# Altium PCB PCB1 - 副本.PcbDoc
Units mil, origin at the board's own origin, x right, y up, seen from the top; angles counter-clockwise.
Board outline 2165.35 x 6102.36 mil, 2 copper layers (Top Layer, Bottom Layer); 142 components, 117 nets, 421 pads, 58 vias.
Unrouted connection lines stored in the file: 77.
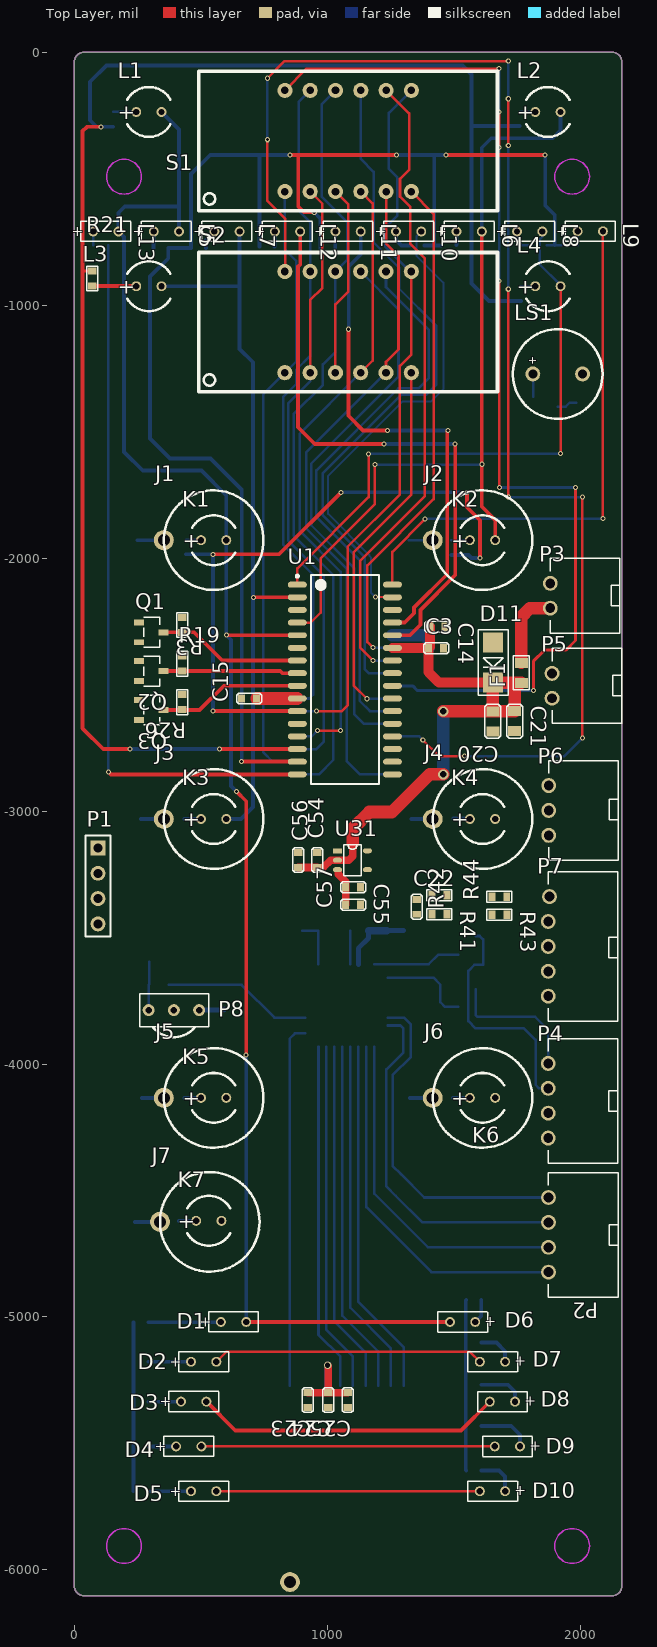
[diagram p0: Top Layer view]
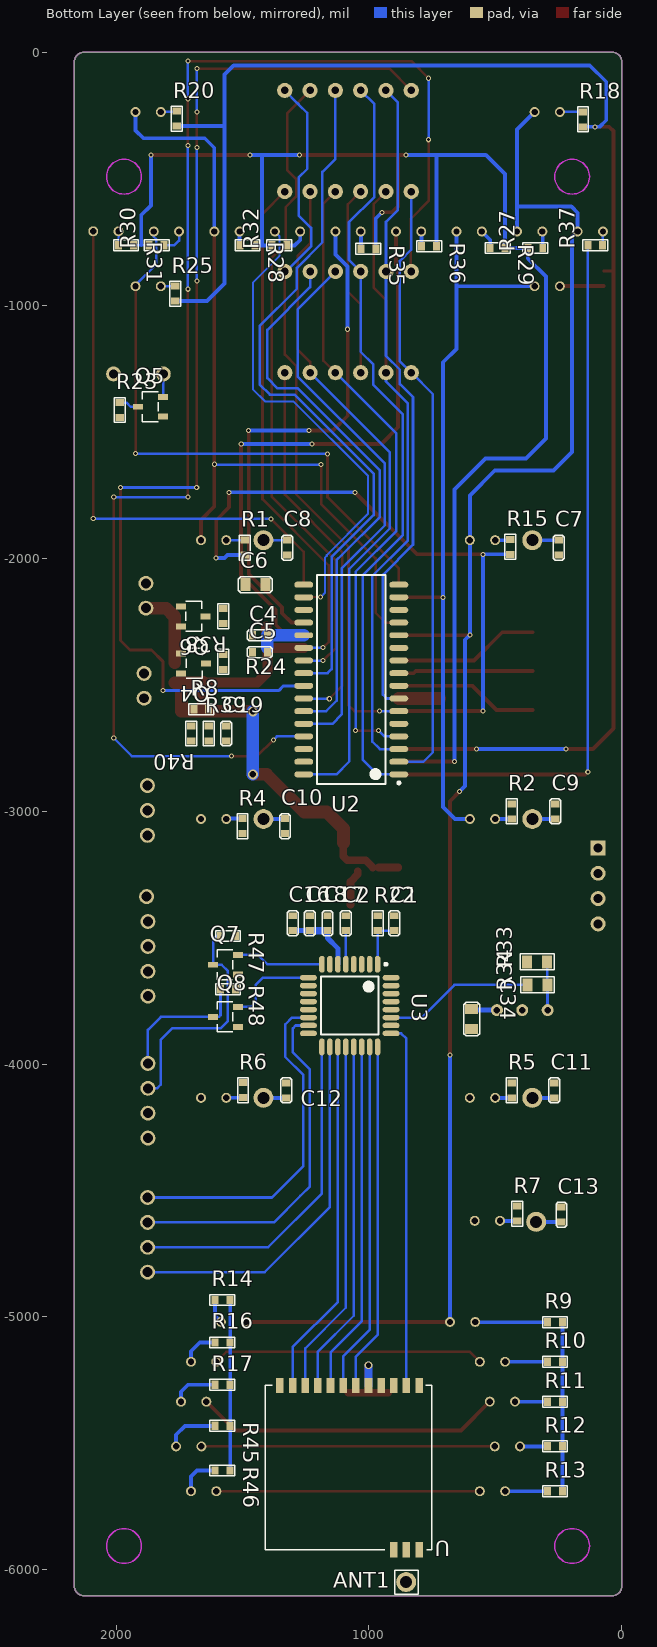
[diagram p1: Bottom Layer view, seen from below]

## Layer stack, top to bottom
Top Layer: signal copper 1.4
Dielectric: dielectric 12.6, FR-4, Dk 4.8
Bottom Layer: signal copper 1.4

## Board outline
0,-6062.99 ccw(c39.37,-6062.99) 39.37,-6102.36 2125.98,-6102.36 ccw(c2125.98,-6062.99) 2165.35,-6062.99 2165.35,-6062.65 2165.35,-39.37 ccw(c2125.98,-39.37) 2125.98,0 39.37,0 ccw(c39.37,-39.37) 0,-39.37

## Design rules (kind name [scope] priority, off if disabled: settings)
Clearance [All] p1: gap=10
PolygonConnect [All] p1: connectstyle=Relief reliefconductorwidth=10 reliefentries=4 polygonreliefangle="90 Angle"
RoutingVias [All] p1: holewidth=28 width=50 viastyle="Through Hole" minholewidth=28 minwidth=50 maxholewidth=28 maxwidth=50
SilkscreenOverComponentPads [All] p1: minsilkscreentomaskgap=10
SolderMaskExpansion [All] p1: expansion=4
Width [All] p1: maxlimit=200 minlimit=6 preferedwidth=10 minimp=50.000000 maximp=50.000000 favimp=50.000000
27 further rules are at their usual default settings.

## Classes and differential pairs
component class TouchPad: C4 C5 C6 C7 C8 C9 C10 C11 C12 C13 J1 J2 J3 J4 J5 J6 J7 LS1 Q1 Q4 Q6 R23 R24 R38 S1 S2 U2
component class INTERFACE: C19 C20 C21 C22 D11 F1 P2 P3 P4 P5 P6 P7 Q7 Q8 R8 R39 R40 R41 R42 R43 R44 R47 R48
component class LED: C3 C14 C15 D1 D2 D3 D4 D5 D6 D7 D8 D9 D10 K1 K2 K3 K4 K5 K6 K7 L1 L2 L3 L4 L5 L6 L7 L8 L9 L10 L11 L12 L13 Q1 Q2 Q3 R1 R2 R3 R4 R5 R6 R7 R9 R10 R11 R12 R13 R14 R15 R16 R17 R18 R19 R20 R21 R25 R26 R27 R28 R29 R30 R31 R32 R35 R36 R37 R45 R46 U1
component class MCU: C1 C2 C16 C17 C18 P1 R22 U3
component class RF: ANT1 C23 C24 C25 C34 C54 C55 C56 C57 P8 R33 R34 U U31

## Components (designator, comment, footprint, x,y, rotation, side; value= is the part's Value field where it differs from the comment)
ANT1 "TP" ANT_TH 853,-6048 r270 bottom
C1 "0.1uF/16V" 0603C 901,-3473 r90 bottom
C2 "2.2uF/6.3V" 0603C 1092,-3413.94 r270 bottom
C3 "0.1uF/16V" 0603C 1401,-2356 r0 top
C4 "0.1uF/16V" 0603C 1402.13,-2305 r0 bottom
C5 "0.01uF/16V" 0603C 1402.13,-2373 r0 bottom
C6 "22uF/16V" 0805C 1410,-2105 r0 bottom
C7 "10PF/16V" 0603C 250,-1988 r90 bottom
C8 "10PF/16V" 0603C 1323,-1988 r90 bottom
C9 "10PF/16V" 0603C 264,-2972 r270 bottom
C10 "10PF/16V" 0603C 1332,-3089.06 r90 bottom
C11 "10PF/16V" 0603C 267,-4075 r270 bottom
C12 "10PF/16V" 0603C 1327,-4075 r270 bottom
C13 "10PF/16V" 0603C 239,-4566 r270 bottom
C14 "0.1uF/16V" 0603C 1406,-2271 r0 top
C15 "10uF/16V" 0603C 721,-2555 r180 top
C16 "0.1uF/16V" 0603C 1302,-3473 r90 bottom
C17 "0.1uF/16V" 0603C 1164,-3473 r90 bottom
C18 "10uF/16V" 0603C 1235,-3473 r90 bottom
C19 "0.1uF/16V" 0603C 1565,-2723.06 r90 bottom
C20 "22uF/16V" 0805C 1655,-2606 r270 top
C21 "10uF/16V" 0805C 1741,-2605 r270 top
C22 "0.1uF/16V" 0603C 1354,-3408 r90 top
C23 "0.1uF/16V" 0603C 924,-5299 r270 top
C24 "0.10uF/16V" 0603C 1004,-5299 r270 top
C25 "10uF/16V" 0603C 1081,-5299 r270 top
C34 "22uF/16V" 0805C 594,-3783 r270 bottom
C54 "0.1uF/10V" 0603C 961,-3223 r90 top
C55 "0.1uF/10V" 0603C 1073,-3302 r0 top
C56 "10uF/10V" 0603C 885,-3164 r270 top
C57 "10uF/10V" 0603C 1132,-3370 r180 top
D1 "LED0" LED_DIP_257MM 579.92,-5019.68 r0 top locked
D2 "LED0" LED_DIP_257MM 461.81,-5177.17 r0 top locked
D3 "LED0" LED_DIP_257MM 422.44,-5334.65 r0 top locked
D4 "LED0" LED_DIP_257MM 402.76,-5511.81 r0 top locked
D5 "LED0" LED_DIP_257MM 461.81,-5688.98 r0 top locked
D6 "LED0" LED_DIP_257MM 1585.43,-5019.68 r180 top locked
D7 "LED0" LED_DIP_257MM 1703.54,-5177.17 r180 top locked
D8 "LED0" LED_DIP_257MM 1742.91,-5335 r180 top locked
D9 "LED0" LED_DIP_257mm 1762.6,-5511.81 r180 top locked
D10 "LED0" LED_DIP_257mm 1703.54,-5688.98 r180 top locked
D11 "SMA6.5CA" SMA 1656,-2334 r270 top
F1 "500mA" 0805R 1768,-2493 r90 top
J1 "TP" TOUCHU_PAD 551.18,-1929.13 r0 top locked
J2 "TP" TOUCHU_PAD 1614.17,-1929.13 r0 top locked
J3 "TP" TOUCHU_PAD 551.18,-3031.5 r0 top locked
J4 "TP" TOUCHU_PAD 1614.17,-3031.5 r0 top locked
J5 "TP" TOUCHU_PAD 551.18,-4133.86 r0 top locked
J6 "TP" TOUCHU_PAD 1614.17,-4133.86 r0 top locked
J7 "TP" TOUCHU_PAD 536,-4624 r0 top locked
K1 "LED0" LED_DIP_5MM 501.18,-1929.13 r0 top locked
K2 "LED0" LED_DIP_5MM 1564.17,-1929.13 r0 top locked
K3 "LED0" LED_DIP_5MM 501.18,-3031.5 r0 top locked
K4 "LED0" LED_DIP_5MM 1564.17,-3031.5 r0 top locked
K5 "LED0" LED_DIP_5MM 501.18,-4133.86 r0 top locked
K6 "LED0" LED_DIP_5MM 1564.17,-4133.86 r0 top locked
K7 "LED0" LED_DIP_5MM 482,-4620 r0 top
L1 "LED0" LED_DIP_5mm 245.28,-236.22 r0 top locked
L2 "LED0" LED_DIP_5mm 1822.83,-236.22 r0 top locked
L3 "LED0" LED_DIP_5mm 245.28,-925.2 r0 top locked
L4 "LED0" LED_DIP_5mm 1822.83,-925.2 r0 top locked
L5 "LED0" LED_DIP_257MM 314.57,-708.66 r0 top locked
L6 "LED0" LED_DIP_257MM 1511.42,-708.66 r0 top locked
L7 "LED0" LED_DIP_257MM 553.94,-708.66 r0 top
L8 "LED0" LED_DIP_257MM 1750.79,-708.66 r0 top locked
L9 "LED0" LED_DIP_257MM 1990.16,-708.03 r0 top locked
L10 "LED0" LED_DIP_257MM 1272.05,-708.66 r0 top
L11 "LED0" LED_DIP_257MM 1032.68,-708.66 r0 top
L12 "LED0" LED_DIP_257MM 793.31,-708.66 r0 top
L13 "LED0" LED_DIP_257MM 75.2,-708.66 r0 top locked
LS1 "Buzzer" BUFFER_0905 1813,-1272 r0 top
P1 "Header 4" HDR1X4 94,-3146 r270 top
P2 "Header 4" 4-2.5MM-W 1875,-4823 r90 top
P3 "Header 2" 2-2.5MM-W 1882,-2198 r90 top
P4 "Header 4" 4-2.5MM-W 1874,-4293 r90 top
P5 "Header 2" 2-2.5MM-W 1889,-2554 r90 top
P6 "Header 3" 3-2.5MM-W 1876,-3096 r90 top
P7 "Header 5" 5-2.5MM-W 1874,-3732 r90 top
P8 "VS1838B" VS1838B 294,-3787 r0 top
Q1 "SI2306." SOT23-3 255.31,-2253.91 r180 top
Q2 "HY0320" SOT23-3 255.31,-2407.46 r180 top
Q3 "HY0320" SOT23-3 255.31,-2561 r180 top
Q4 "SI2306." SOT23-3 1742.43,-2377 r0 bottom
Q5 "S8050" SOT23-3 1814,-1441 r180 bottom
Q6 "SI2306." SOT23-3 1744,-2191 r0 bottom
Q7 "SI2306." SOT23-3 1518,-3647 r180 bottom
Q8 "SI2306." SOT23-3 1518,-3853 r180 bottom
R1 "1.5K" 0603R 1491,-1928.94 r270 bottom
R2 "1.5K" 0603R 436,-3031.06 r90 bottom
R3 "10K" 0603R 428,-2235 r270 top
R4 "1.5K" 0603R 1500,-3030 r270 bottom
R5 "1.5K" 0603R 435,-4134 r90 bottom
R6 "1.5K" 0603R 1498,-4133.06 r90 bottom
R7 "1.5K" 0603R 414,-4621 r90 bottom
R8 "100K" 0603R 1692.65,-2598 r180 bottom
R9 "1.5K" 0603R 294,-5021 r180 bottom
R10 "1.5K" 0603R 294,-5177 r180 bottom
R11 "1.5K" 0603R 294,-5335 r180 bottom
R12 "1.5K" 0603R 294,-5512 r180 bottom
R13 "1.5K" 0603R 294,-5689 r180 bottom
R14 "1.5K" 0603R 1609,-4933 r180 bottom
R15 "1.5K" 0603R 441,-1926 r270 bottom
R16 "1.5K" 0603R 1609,-5101 r180 bottom
R17 "1.5K" 0603R 1609,-5268 r180 bottom
R18 "1.5K" 0603R 154,-236 r270 bottom
R19 "10K" 0603R 428,-2387.5 r270 top
R20 "1.5K" 0603R 1760,-233 r270 bottom
R21 "1.5K" 0603R 72,-924 r90 top
R22 "10K" 0603R 965.65,-3473 r90 bottom
R23 "1K" 0603R 1985,-1444 r90 bottom
R24 "4.7K" 0603R 1576,-2440 r90 bottom
R25 "1.5K" 0603R 1766,-925 r270 bottom
R26 "10K" 0603R 428,-2540 r270 top
R27 "1.5K" 0603R 313,-774 r0 bottom
R28 "1.5K" 0603R 1510,-763 r180 bottom
R29 "1.5K" 0603R 521,-774 r180 bottom
R30 "1.5K" 0603R 1810,-763 r0 bottom
R31 "1.5K" 0603R 1990,-763 r180 bottom
R32 "1.5K" 0603R 1325,-764 r0 bottom
R33 "10K" 0805R 296,-3596 r0 bottom
R34 "100" 0805R 294.26,-3687 r0 bottom
R35 "1.5K" 0603R 1032,-777 r180 bottom
R36 "1.5K" 0603R 792,-768 r180 bottom
R37 "1.5K" 0603R 76,-763 r0 bottom
R38 "4.7K" 0603R 1576,-2200 r270 bottom
R39 "100" 0603R 1633.65,-2723.06 r90 bottom
R40 "100K" 0603R 1702.65,-2664 r270 bottom
R41 "100" 0603R 1414,-3408.35 r0 top
R42 "100K" 0603R 1473,-3333 r180 top
R43 "100" 0603R 1651,-3410 r0 top
R44 "100K" 0603R 1710,-3338 r180 top
R45 "1.5K" 0603R 1609,-5431 r180 bottom
R46 "1.5K" 0603R 1609,-5607 r180 bottom
R47 "4.7K" 0603R 1587,-3494 r180 bottom
R48 "4.7K" 0603R 1587,-3704 r180 bottom
S1 "SEG_4_0.36" DISPLAY_0.36INCH_4 833,-151 r0 top locked
S2 "SEG_4_0.36" DISPLAY_0.36INCH_4 832.68,-867 r0 top locked
U "HW3000" HW3000 802,-5271 r270 bottom
U1 "TM1629A" SOP127P1040X265-32N 1070,-2480 r0 top
U2 "TM1648A" SOP127P1040X265-32N 1070,-2480 r0 bottom
U3 "STM8S003K3T6C" QFP80P900X900X245-32N 1076,-3769 r270 bottom
U31 "TLV70433DBVT" SOT23-5(DBV) 1041,-3157 r0 top

## Footprints (in the part's own frame and the unit in brackets; to place one, negate y for a bottom-side part, rotate by r counter-clockwise, add the part's x,y. Pads: shape width x height; smd on the part's side, far side on the other; paste and mask are expansions set on the pad)
2-2.5MM-W [mm]
  round 1.5 hole 1: 1(0,0) 2(2.5,0)
  silkscreen extent -2.5,-7 5,0
3-2.5MM-W [mm]
  round 1.5 hole 1: 1(0,0) 2(2.5,0) 3(5,0)
  silkscreen extent -2.5,-7 7.5,0
4-2.5MM-W [mm]
  round 1.5 hole 1: 1(0,0) 2(2.5,0) 3(5,0) 4(7.5,0)
  silkscreen extent -2.5,-7 10,0
5-2.5MM-W [mm]
  round 1.5 hole 1: 1(0,0) 2(2.5,0) 3(5,0) 4(7.5,0) 5(10,-0.127)
  silkscreen extent -2.5,-7 12.5,0
0603C [mm]
  rect 0.7x0.85 smd: 1(0,0) 2(1.5,0)
  silkscreen extent -0.5,-0.55 2,0.55
0603R [mm]
  rect 0.7x0.85 smd: 1(0,0) 2(1.5,0)
  silkscreen extent -0.5,-0.55 2,0.55
0805C [mm]
  rect 1x1.3 smd: 1(0,0) 2(2,0)
  silkscreen extent -0.7,-0.8 2.7,0.8
0805R [mm]
  rect 1x1.3 smd: 1(0,0) 2(2,0)
  silkscreen extent -0.7,-0.8 2.7,0.8
ANT_TH [mm]
  round 2 hole 1.2: 1(0,0)
  silkscreen extent -1.19,-1.17 1.24,1.19
BUFFER_0905 [mm]
  round 1.5 hole 0.9: 1(0,0) 2(5,0)
  silkscreen extent -2,-4.5 7,4.5
DISPLAY_0.36INCH_4 [mil]
  round 60 hole 30: 1(0,-400) 2(100,-400) 3(200,-400) 4(300,-400) 5(400,-400) 6(500,-400) 7(500,0) 8(400,0) 9(300,0) 10(200,0) 11(100,0) 12(0,0)
  silkscreen extent -341,-476 841,76
HDR1X4 [mm] "Connector; Header; 4 Position"
  rect 1.5x1.5 hole 0.9: 1(0,0)
  round 1.5 hole 0.9: 2(2.54,0) 3(5.08,0) 4(7.62,0)
  silkscreen extent -1.27,-1.27 8.89,1.27
HW3000 [mil]
  rect 60x30 smd: 1(0,0) 2(0,-50) 3(0,-100) 4(0,-150) 5(0,-200) 6(0,-250) 7(0,-300) 8(0,-350) 9(0,-400) 10(0,-450) 11(0,-500) 12(0,-550) 13(649.61,-100) 14(649.61,-50) 15(649.61,0)
  silkscreen extent 0,-607 650,50
LED_DIP_5MM [mm]
  round 1 hole 0.635: 1(0,0) 2(2.54,0)
  silkscreen extent -0.9,-2.5 3.44,2.5
LED_DIP_5mm [mm]
  round 1 hole 0.635: 1(0,0) 2(2.54,0)
  silkscreen extent -0.9,-2.5 3.44,2.5
LED_DIP_257MM [mm]
  round 1 hole 0.635: 1(0,0) 2(2.54,0)
  silkscreen extent -1.24,-1 3.77,1.02
LED_DIP_257mm [mm]
  round 1 hole 0.635: 1(0,0) 2(2.54,0)
  silkscreen extent -1.24,-1 3.77,1.02
QFP80P900X900X245-32N [mm] "QFP, 32-Leads, Body 9.2x9.2mm (max), Pitch 0.80mm, IPC Medium Density"
  oval 1.7x0.55 smd: 1(-4.15,2.8) 2(-4.15,2) 3(-4.15,1.2) 4(-4.15,0.4) 5(-4.15,-0.4) 6(-4.15,-1.2) 7(-4.15,-2) 8(-4.15,-2.8) 17(4.15,-2.8) 18(4.15,-2) 19(4.15,-1.2) 20(4.15,-0.4) 21(4.15,0.4) 22(4.15,1.2) 23(4.15,2) 24(4.15,2.8)
  oval 0.55x1.7 smd: 9(-2.8,-4.15) 10(-2,-4.15) 11(-1.2,-4.15) 12(-0.4,-4.15) 13(0.4,-4.15) 14(1.2,-4.15) 15(2,-4.15) 16(2.8,-4.15) 25(2.8,4.15) 26(2,4.15) 27(1.2,4.15) 28(0.4,4.15) 29(-0.4,4.15) 30(-1.2,4.15) 31(-2,4.15) 32(-2.8,4.15)
  silkscreen extent -4.27,-2.9 2.9,3.75, body extent -3.5,-3.5 3.5,3.5, height 2.45
SMA [mm]
  rect 2x2 smd: 1(0,0) 2(4,0)
  silkscreen extent -1.3,-1.5 5.3,1.5
SOP127P1040X265-32N [mm] "SOP, 32-Leads, Body 21.0x7.6mm (max), Pitch 1.27mm, IPC Medium Density"
  oval 1.9x0.6 smd: 1(-4.775,9.525) 2(-4.775,8.255) 3(-4.775,6.985) 4(-4.775,5.715) 5(-4.775,4.445) 6(-4.775,3.175) 7(-4.775,1.905) 8(-4.775,0.635) 9(-4.775,-0.635) 10(-4.775,-1.905) 11(-4.775,-3.175) 12(-4.775,-4.445) 13(-4.775,-5.715) 14(-4.775,-6.985) 15(-4.775,-8.255) 16(-4.775,-9.525) 17(4.775,-9.525) 18(4.775,-8.255) 19(4.775,-6.985) 20(4.775,-5.715) 21(4.775,-4.445) 22(4.775,-3.175) 23(4.775,-1.905) 24(4.775,-0.635) 25(4.775,0.635) 26(4.775,1.905) 27(4.775,3.175) 28(4.775,4.445) 29(4.775,5.715) 30(4.775,6.985) 31(4.775,8.255) 32(4.775,9.525)
  silkscreen extent -4.9,-10.5 3.42,10.5, body extent -3.81,-10.49 3.81,10.49, height 2.65
SOT23-3 [mm]
  rect 1x0.6 smd: 1(0,0) 2(0,2) 3(-2.5,1)
  silkscreen extent -2.1,-0.5 -0.5,2.5
SOT23-5(DBV) [mm]
  rect 0.9x0.5 smd: 1(0,0)
  oval 0.9x0.5 smd: 2(0,-0.95) 3(0,-1.9) 4(3,-1.9) 5(3,0)
  silkscreen extent 0.6,-2.5 2.4,0.6
TOUCHU_PAD [mm]
  round 2 hole 1.2: 1(-5,0)
  silkscreen extent -5,-5 5,5
VS1838B [mm]
  round 1.2 hole 0.65: 1(0,0) 2(2.54,0) 3(5.08,0)
  silkscreen extent -0.89,-2.71 6.02,1.65

## Part data
C1 C2 C3 C4 C5 C6 C7 C8 C9 C10 C11 C12 C13 C14 C15 C16 C17 C18 C19 C20 C21 C22 C23 C24 C25 C54 C55 C56 C57: library part Cap, "Capacitor"
C34: library part Cap2, "Capacitor"
D1 D2 D3 D4 D5 D6 D7 D8 D9 D10 K1 K2 K3 K4 K5 K6 K7 L1 L2 L3 L4 L5 L6 L7 L8 L9 L10 L11 L12 L13: "Typical INFRARED GaAs LED"
D11: library part "D Schottky", "Schottky Diode"
F1: library part "Fuse 1", "Fuse"
J1 J2 J3 J4 J5 J6 J7: library part TOUCH_PAD, "TEST_3P"
LS1: "Magnetic Transducer Buzzer"
P1 P2 P4: "Header, 4-Pin"
P3 P5: "Header, 2-Pin"
P6: "Header, 3-Pin"
P7: "Header, 5-Pin"
P8: library part "Header 3", "Header, 3-Pin"
Q1 Q2 Q3 Q4 Q6 Q7 Q8: library part BUK92150-55A, "BUK92150-55A"
Q5: library part NPN, "NPN Bipolar Transistor"
R1 R2 R4 R5 R6 R7 R8 R9 R10 R11 R12 R13 R14 R15 R16 R17 R18 R20 R21 R22 R23 R24 R25 R27 R28 R29 R30 R31 R32 R35 R36 R37 R38 R39 R40 R41 R42 R43 R44 R45 R46 R47 R48: library part Res1, "Resistor"
R3 R19 R26: library part Res2, "Resistor"
R33 R34: library part R, "R"
U31: library part TPS76318

## Via types
v1: diameter 20, hole 12, Top Layer to Bottom Layer, tented both sides, 55 vias
v2: diameter 40, hole 25, Top Layer to Bottom Layer, tented both sides, 2 vias
v3: diameter 30, hole 20, Top Layer to Bottom Layer, tented both sides, 1 vias

## Nets (pads, with @x,y where several pads share a name; then routed paths per layer and width w, separated by ;. In a path a pad name is that pad's centre, name@x,y a point inside that pad or via, vN(x,y) a via of type N, cw(c..) or ccw(c..) an arc to the next point about the centre after c; other vN are vias at no path point)
AD: C19.1 R39.1 U3.16
BUZZER: Q5.1 U3.13
CLK: Q2.2 U3.29
DIG1: S1.6 U2.22 | length 2033.1
  Top Layer w10: v1(1181,-2354) 1159,-2332 1159,-2029 1421,-1767 1421,-639 S1.6
  Bottom Layer w10: v1@1182,-2355 U2.22
DIG2: S1.8 U2.23 | length 2549.7
  Top Layer w10: v1(1181,-2405) 1131,-2355 1131,-2010 1385,-1756 1385,-814 1329,-758 1329,-612 1288,-571 1288,-501 1324,-465 1324,-242 S1.8
  Bottom Layer w10: v1(1181,-2405) U2.23
DIG3: S1.9 U2.24 | length 2841
  Bottom Layer w10: S1.9 1133,-422 1184,-473 1184,-751.28 1285,-852.28 1285,-935 1432,-1082 1432,-1314 1392,-1354 1294,-1354 982,-1666 982,-1830 1148,-1996 1148,-2439 1164,-2455 U2.24
DIG4: S1.12 U2.25 | length 4326.5
  Top Layer w10: S1.12 919,-65 v1(1680,-65) ; v1@1680,-1720 v1(1680,-905) ; v1(1680,-376) v1(1680,-237)
  Top Layer w12: v1(1815,-2524) 1815,-2408 1860,-2363 1945,-2363 1982,-2326 1982,-2204 1982,-2195 v1(1982,-1720)
  Bottom Layer w10: v1(1680,-905) v1(1680,-376) ; v1(1680,-237) v1(1680,-65)
  Bottom Layer w12: U2.25 1338,-2505 1357,-2524 v1(1815,-2524) ; v1(1681,-1720) v1(1982,-1720)
DIG5: S2.6 U2.26 | length 1504
  Top Layer w10: v1(1157,-2556) 1106,-2505 1106,-1976 1332.68,-1749.32 S2.6
  Bottom Layer w10: v1(1157,-2556) U2.26@1256.99,-2556
DIG6: S2.8 U2.27 | length 2216.1
  Bottom Layer w10: S2.8 1232.68,-928.68 1402,-1098 1402,-1288 1361,-1329 1281,-1329 957,-1653 957,-1837 1107.79,-1987.79 1128,-2008 1128,-2564 1169,-2605 U2.27
DIG7: S2.9 U2.28 | length 2191.9
  Bottom Layer w10: S2.9 1282,-1016.32 1282,-1281.32 937,-1626.32 937,-1870 1108,-2041 1108,-2618 1145,-2655 U2.28
DIG8: S2.12 U2.29 | length 5557.3
  Top Layer w10: v1(764,-346) 764,-588 835,-659 835,-864.68 S2.12 ; v1(764,-103) 832,-35 v1(1716,-35) ; v1(1378,-2719) 1442,-2783 v1(1543,-2783) ; v1(1716,-1759) v1(1716,-937) ; v1(1716,-368) v1(1716,-184) ; v1(2009,-2712) v1(2009,-1759)
  Bottom Layer w10: v1(764,-346) v1(764,-103) ; U2.29 1364,-2705 v1(1378,-2719) ; v1(1543,-2783) 1938,-2783 v1(2009,-2712) ; v1(1716,-1759) v1(2009,-1759) ; v1(1716,-937) v1(1716,-368) ; v1(1716,-184) v1(1716,-35)
DIO: Q1.2 U3.2
FEED: R43.1
GND: C1.2 C2.1 C3.2 C4.2 C5.2 C6.2 C7.1 C8.1 C9.1 C10.1 C11.1 C12.1 C13.1 C14.2 C15.2 C16.2 C17.2 C18.2 C19.2 C20.2 C21.2 C22.2 C23.2 C24.2 C25.2 C34.2 C54.2 C55.2 C56.1 C57.1 D11.1 LS1.2 P1.3 P3.2 P4.2 P5.2 P6.2 P7.3 P8.2 R40.2 R42.2 R44.2 U1.3 U1.6 U1.30 U2.5 U2.16 U3.4 U31.1 U31.4 U31.5 U.1 U.12 U.13 U.15
IN: C22.1 R41.1 U3.28
IRLED: R34.2 U3.27 | length 593.1
  Bottom Layer w10: R34.2 662,-3687 791.24,-3816.24 U3.27
K3: P2.4 U3.14 | length 1360.2
  Bottom Layer w10: U3.14 1304.24,-3816.24 1331,-3843 1331,-3972 1259,-4044 1259,-4403 1291.08,-4435.08 1383.72,-4527.72 P2.4
K4: P2.2 U3.17 | length 1356.6
  Bottom Layer w10: U3.17 1186.24,-4512.24 1398.57,-4724.57 P2.2
K6: P2.1 U3.18 | length 1460.2
  Bottom Layer w10: U3.18 1154.74,-4565.74 1412,-4823 P2.1
K7: P2.3 U3.15 | length 1418.9
  Bottom Layer w10: U3.15 1289.74,-3847.74 1301,-3859 1301,-3954 1234,-4021 1234,-4484 1270.88,-4520.88 1376.15,-4626.15 P2.3
KEY1: C7.2 J1.1 U2.11 | length 104.1
  Bottom Layer w15: C7.2@250.19,-1929.13 J1.1
KEY2: C8.2 J2.1 U2.10 | length 94.4
  Bottom Layer w10: C8.2 1417.13,-1928.94 J2.1
KEY3: C9.2 J3.1 U2.9 | length 89.9
  Bottom Layer w15: C9.2@264.44,-3031.5 J3.1
KEY4: C10.2 J4.1 U2.8 | length 83.8
  Bottom Layer w15: C10.2@1333.5,-3031.5 J4.1
KEY5: C13.2 J7.1 U2.12 | length 99.1
  Bottom Layer w15: C13.2 J7.1@338.09,-4625.06
KEY6: C12.2 J6.1 U2.13 | length 90.1
  Bottom Layer w15: C12.2 J6.1@1417.13,-4134.06
KEY7: C11.2 J5.1 U2.14 | length 87.1
  Bottom Layer w15: C11.2 J5.1@354.13,-4134.06
LGRID1: D1.2 D6.2 K1.2 L1.2 L5.2 L13.2 U1.5 | length 6616.8
  Top Layer w15: v1@602.36,-2305 U1.5 ; v1(642,-2923) 679.92,-2960.92 v1(679.92,-3964.92) ; D1.2 D6.2
  Bottom Layer w15: L1.2 414.57,-305.51 L5.2 ; 361,-610 304,-610 ; 408.57,-610 304,-610 ; v1(642,-2923) 620,-2901 620,-2322.64 v1(601.18,-2303.82) K1.2 601.18,-1752.18 503,-1654 271,-1654 197,-1580 197,-730.46 L13.2 175.2,-634.8 200,-610 304,-610 ; D1.2 v1(679.92,-3964.92)
LGRID2: D2.2 D7.2 K2.2 L2.2 L6.2 U1.4 | length 4265.8
  Top Layer w10: D2.2 600.98,-5138 1564.38,-5138 D7.2 ; U1.4 935,-2255 974,-2216 974,-2001 1189,-1786 v1(1189,-1630)
  Top Layer w15: L6.2 v1(1611.42,-1629) 1611.42,-1796.42 1664.17,-1849.17 K2.2
  Bottom Layer w10: v1(1189,-1630) v1@1611.42,-1630
  Bottom Layer w15: L6.2 1611.42,-377.58 1649,-340 1891.83,-340 1922.83,-309 L2.2
LGRID3: D3.2 D8.2 K3.2 L3.2 L7.2 U1.2 | length 4120.5
  Top Layer w15: D3.2 636.8,-5449 1528.91,-5449 D8.2 ; v1(708,-2155) U1.2
  Bottom Layer w15: L3.2 653.94,-925.2 ; K3.2 659.5,-3031.5 707,-2984 707,-2925.68 707,-1226 653.94,-1172.94 653.94,-925.2 ; L7.2 653.94,-925.2
LGRID4: D4.2 D9.2 K4.2 L4.2 L8.2 U1.1 | length 3470.4
  Top Layer w10: D4.2 D9.2 ; U1.1 882.01,-2040.99 1164,-1759 v1(1164,-1588) ; v1@1922.83,-1588 v1(1922.83,-1587) L4.2
  Bottom Layer w10: v1(1164,-1588) v1@1922.83,-1588 ; L8.2 1850.79,-729.54 1840.28,-740.05 1840.28,-838.28 1922.83,-920.83 L4.2
LGRID5: D5.2 D10.2 K5.2 L9.2 U1.32 | length 3193.3
  Top Layer w10: D5.2 D10.2 ; U1.32 1257.99,-1975.01 v1(1387,-1846) ; v1(2090.16,-1844) L9.2
  Bottom Layer w10: v1@1387,-1844 v1(2090.16,-1844)
LGRID6: K6.2 L10.2 U1.31 | length 1895.2
  Top Layer w8: v1(1191,-2154) 1256.99,-2154 U1.31
  Bottom Layer w8: v1(1191,-2154) 1173,-2136 1173,-1997 1167,-1991 1167,-1988.13 1004,-1825.13 1004,-1675 1299,-1380 1411,-1380 1459,-1332 1459,-911 1354,-806 1354,-726.71 L10.2
LGRID7: K7.2 L11.2 U1.29 | length 2038.6
  Top Layer w15: v1@1084,-1096.35 1084,-1437.36 1141.64,-1495 v1(1238,-1495) ; U1.29 1306.5,-2255 1343.5,-2218 1343.5,-2195.14 ; 1346.74,-2191.91 1475,-2063.64 1475,-1497 v1(1477,-1495)
  Bottom Layer w15: v1(1085.18,-1095.18) 1085.18,-847.32 1132.68,-799.83 L11.2 ; v1(1238,-1495) v1(1477,-1495)
LGRID8: L12.2 U1.28 | length 2324.4
  Top Layer w15: L12.2 893.31,-839.2 885.18,-847.32 885.18,-1483.01 951.17,-1549 v1(1225,-1549) ; U1.28 1327,-2305 1368.5,-2263.5 1368.5,-2205.5 1506,-2068 1506,-1550 v1(1505,-1549)
  Bottom Layer w15: v1(1225,-1549) v1(1505,-1549)
LSEG1: R1.2 R2.2 R4.2 R5.2 R6.2 R7.2 R15.2 U1.11 | length 2565
  Top Layer w15: v1(548.94,-2603.94) 880.95,-2603.94 U1.11 ; v1(548.94,-1985.06) 809.94,-1985.06 v1(1055,-1740) ; v1(1553,-1740) 1553,-1799 1604,-1850 v1(1604,-2000)
  Bottom Layer w15: R15.2 v1(548.94,-1985.06) v1(548.94,-2603.94) ; v1(1055,-1740) v1(1553,-1740) ; R1.2 1559,-1988 1571,-2000 v1(1604,-2000)
LSEG2: R9.2 R10.2 R11.2 R12.2 R13.2 U1.12 | length 668
  Bottom Layer w15: R13.2 R12.2 R11.2 R10.2 R9.2
LSEG3: R14.2 R16.2 R17.2 R45.2 R46.2 U1.13 | length 675.4
  Bottom Layer w15: R46.2 1548.25,-5605.3 1548.25,-5268 1548.25,-4934.7 R14.2
LSEG4: R18.2 R20.2 R21.2 R25.2 U1.14 | length 6401.3
  Top Layer w10: 36.94,-864.94 R21.2
  Top Layer w15: v1@103,-295.06 49.94,-295.06 33,-312 33,-2673 115,-2755 v1(221,-2755) ; v1(575,-2755) U1.14
  Bottom Layer w15: R18.2 v1(106,-295.06) 88.06,-295.06 62,-269 62,-117 127,-52 1535,-52 1571,-88 1571,-292.06 ; v1(221,-2755) v1(575,-2755) ; R20.2 1571,-292.06 ; R25.2 1640.06,-984.06 1571,-915 1571,-292.06
LSEG5: R27.2 R28.2 R29.2 R30.2 R31.2 R32.2 R35.2 R36.2 U1.15 | length 6143.5
  Top Layer w15: v1(662,-2804) 881.01,-2804 U1.15 ; v1(853,-406) 1139,-406 ; 885.5,-438.5 885.5,-448 ; 885.5,-407.5 885.5,-448 ; v1(949,-633) 909,-633 885.5,-609.5 885.5,-448 ; 1206,-406 1139,-406 ; v1(1274,-406) 1139,-406 ; v1(1470,-406) 1818,-406 ; 1846,-406 1818,-406 ; v1(1862,-406) 1818,-406
  Bottom Layer w10: R35.2 R35.2@977.68,-781.73 ; R30.2 1900,-763 R31.2
  Bottom Layer w15: 628.94,-1695.94 608.5,-1675.5 ; v1(662,-2804) 662,-1729 608.5,-1675.5 ; R36.2 732.94,-408.06 ; v1(853,-406) 538,-406 461.94,-482.06 R29.2 R27.2 372.06,-814.94 300,-887 300,-1527 379,-1606 539,-1606 608.5,-1675.5 ; v1(949,-633) 972.94,-656.94 R35.2 ; v1(1274,-406) 1423,-406 ; R32.2 1423,-764 ; 1423,-555 1423,-571 ; R28.2 1449.94,-764 1423,-764 ; v1@1471,-406 v1(1470,-406) 1423,-406 ; v1(1862,-406) 1862,-606 1900,-644 1900,-763 ; 1423,-764 1423,-571 ; 1423,-571 1423,-406
LSEG6: R37.2 U1.16 | length 2833.1
  Top Layer w15: v1(135.06,-2844.94) 145.11,-2855 U1.16
  Bottom Layer w10: v1(135.06,-2844.94) R37.2
MCU_CS: U3.21 U.9 | length 1397.3
  Bottom Layer w10: U3.21 1060.25,-4995.25 1202,-5137 U.9
MCU_IRQ: U3.20 U.10 | length 1405
  Bottom Layer w10: U3.20 1091.75,-4963.75 1252,-5124 U.10
MCU_MISO: U3.24 U.6 | length 1374.3
  Bottom Layer w10: U3.24 965.76,-5070.76 1052,-5157 U.6
MCU_MOSI: U3.23 U.7 | length 1382
  Bottom Layer w10: U3.23 997.26,-5051.26 1102,-5156 U.7
MCU_PDN: U3.19 U.11 | length 1412.7
  Bottom Layer w10: U3.19 1123.24,-4940.24 1302,-5119 U.11
MCU_RF_GPIO0: U3.25 U.2 | length 1440.2
  Bottom Layer w10: U.2 852,-3900 872.76,-3879.24 U3.25
MCU_RF_GPIO1: U.3
MCU_SCK: U3.22 U.8 | length 1389.7
  Bottom Layer w10: U3.22 1028.76,-5017.76 1152,-5141 U.8
MCU_SCL: Q6.2 U3.3
MCU_SDA: Q4.2 U3.7
NetANT1_1: ANT1.1 U.14
NetC2_2: C2.2 U3.5 | length 132.7
  Bottom Layer w10: U3.5 1092,-3605.36 C2.2
NetD1_1: D1.1 R9.1 | length 284.6
  Bottom Layer w15: R9.1 D1.1@578.61,-5021
NetD2_1: D2.1 R10.1 | length 167.6
  Bottom Layer w15: R10.1 D2.1@461.65,-5177
NetD3_1: D3.1 R11.1 | length 128.1
  Bottom Layer w15: R11.1 D3.1@422.09,-5335
NetD4_1: D4.1 R12.1 | length 108.6
  Bottom Layer w15: R12.1 D4.1@402.57,-5512
NetD5_1: D5.1 R13.1 | length 167.8
  Bottom Layer w15: R13.1 D5.1
NetD6_1: D6.1 R14.1 | length 96.4
  Bottom Layer w15: D6.1 1609,-4996.12 R14.1
NetD7_1: D7.1 R16.1 | length 150.5
  Bottom Layer w15: R16.1 1669,-5101 1703.54,-5135.54 D7.1
NetD8_1: D8.1 R17.1 | length 184.6
  Bottom Layer w15: R17.1 1715,-5268 1742.91,-5295.91 D8.1
NetD9_1: D9.1 R45.1 | length 214.1
  Bottom Layer w15: R45.1 1728,-5431 1762.6,-5465.6 D9.1
NetD10_1: D10.1 R46.1 | length 162.7
  Bottom Layer w15: R46.1 1680,-5607 1703.54,-5630.54 D10.1
NetF1_2: F1.2 P3.1 | length 310.3
  Top Layer w50: F1.2 1768,-2232 1802,-2198 P3.1
NetK1_1: K1.1 R15.1 | length 57
  Bottom Layer w15: R15.1@444.13,-1929.13 K1.1
NetK2_1: K2.1 R1.1 | length 73
  Bottom Layer w10: R1.1 K2.1@1563.98,-1928.94
NetK3_1: K3.1 R2.1 | length 64.7
  Bottom Layer w15: R2.1 K3.1@500.74,-3031.06
NetK4_1: K4.1 R4.1 | length 62.7
  Bottom Layer w15: R4.1 K4.1@1562.68,-3030
NetK5_1: K5.1 R5.1 | length 66
  Bottom Layer w15: R5.1 K5.1@501.04,-4134
NetK6_1: K6.1 R6.1 | length 65.4
  Bottom Layer w15: R6.1 K6.1@1563.37,-4133.06
NetK7_1: K7.1 R7.1 | length 67
  Bottom Layer w15: R7.1 K7.1@481,-4621
NetL1_1: L1.1 R18.1 | length 91.4
  Bottom Layer w10: R18.1 245.06,-236 L1.1
NetL2_1: L2.1 R20.1 | length 59.6
  Bottom Layer w10: R20.1@1763.22,-236.22 L2.1
NetL3_1: L3.1 R21.1 | length 173.8
  Top Layer w15: R21.1 244.08,-924 L3.1
NetL4_1: L4.1 R25.1 | length 56.6
  Bottom Layer w10: R25.1 L4.1@1822.64,-925
NetL5_1: L5.1 R27.1 | length 63.8
  Bottom Layer w15: R27.1 L5.1@313,-710.23
NetL6_1: L6.1 R28.1 | length 54.9
  Bottom Layer w15: R28.1 1511.42,-761.58 L6.1
NetL7_1: L7.1 R29.1 | length 79
  Bottom Layer w15: R29.1 521,-741.6 L7.1
NetL8_1: L8.1 R30.1 | length 102.9
  Bottom Layer w10: L8.1 1750.79,-744.79 1769,-763 R30.1
NetL9_1: L9.1 R31.1 | length 54.8
  Bottom Layer w10: R31.1 L9.1@1990,-708.19
NetL10_1: L10.1 R32.1 | length 95.4
  Bottom Layer w15: L10.1 1272.05,-742.05 1294,-764 R32.1
NetL11_1: L11.1 R35.1 | length 67.7
  Bottom Layer w15: R35.1 L11.1@1032,-709.34
NetL12_1: L12.1 R36.1 | length 58
  Bottom Layer w15: R36.1 L12.1@792,-709.97
NetL13_1: L13.1 R37.1 | length 53.5
  Bottom Layer w10: R37.1 L13.1@76,-709.46
NetLS1_1: LS1.1 Q5.2 | length 89.3
  Bottom Layer w10: Q5.2 LS1.1@1814,-1273
NetP4_3: P4.3 Q7.3 R47.1 | length 931.5
  Bottom Layer w10: R47.1 1603,-3494 1616.43,-3507.43 Q7.3 1582.37,-3607.63 1558.22,-3631.78 1558.22,-3829 1558.22,-3830.22 1587,-3859 1778,-3859 1824,-3905 1824,-4082.15 1838,-4096.15 P4.3
NetP4_4: P4.4 Q8.3 R48.1 | length 546.7
  Bottom Layer w10: R48.1 1587,-3807 1593.63,-3813.63 Q8.3 1822.63,-3813.63 1874,-3865 P4.4
NetP5_1: P5.1 R8.2 R39.2 R40.1
NetP6_3: P6.3 R41.2 R42.1
NetP7_5: P7.5 R43.2 R44.1
NetP8_1: P8.1 R33.1 R34.1 | length 189
  Bottom Layer w10: P8.1@294.26,-3786.74 R34.1 ; R34.1@296,-3685.26 R33.1
NetQ1_3: Q1.3 R3.2 U1.7 | length 574.5
  Top Layer w15: Q1.3 473.28,-2293.28 585,-2405 U1.7
NetQ2_3: Q2.3 R19.2 U1.8 | length 531.5
  Top Layer w15: Q2.3 R19.2@427.73,-2446.83 ; R19.2 814.56,-2446.56 823,-2455 U1.8
NetQ3_3: Q3.3 R26.2 U1.9 | length 567.8
  Top Layer w15: Q3.3 495.63,-2600.37 591,-2505 U1.9
NetQ4_3: Q4.3 R24.1 U2.20
NetQ5_3: Q5.3 R23.2 | length 79.5
  Bottom Layer w10: Q5.3 1942.37,-1401.63 1959.06,-1384.94 R23.2
NetQ6_3: Q6.3 R38.1 U2.19
PWM: U3.31
PWM_10KHZ: P7.4 U3.10
PWM_10KHZ1: P7.2 U3.11
PWM_50HZ: P7.1 U3.12
RF_GPIO2: U.4
RST: C1.1 P1.4 R22.1 U3.1 | length 197.2
  Bottom Layer w10: C1.1 R22.1 U3.1@965.65,-3605.5
SEG1: S1.11 S2.11 U2.7 | length 2589.7
  Bottom Layer w10: U2.7 930,-2555 945,-2540 945,-2066 826,-1947 826,-1363.68 877.68,-1312 877.68,-1255.32 932.68,-1200.32 S2.11 932.68,-671 887,-625.32 887,-197 S1.11
SEG2: S1.7 S2.7 U2.6 | length 2860.7
  Top Layer w10: v1(958,-2605) 1058,-2605 1081,-2582 1081,-1955 1287.68,-1748.32 1287.68,-1240.28 1332.68,-1195.28 S2.7
  Bottom Layer w10: U2.6 v1(958,-2605) ; S2.7 1328,-867 1229,-768 1229,-695 1278,-646 1278,-495 1244,-461 1244,-240 1278,-206 1282,-202 S1.7
SEG3: S1.4 S2.4 U2.4 | length 2517
  Top Layer w10: v1(962,-2682) v1(1053,-2682) ; S2.4 1180,-1219.68 1180,-598 S1.4
  Bottom Layer w10: U2.4 939,-2705 v1(962,-2682) ; v1(1053,-2682) 1053,-2054 892,-1893 892,-1507.68 S2.4
SEG4: S1.2 S2.2 U2.3 | length 2425.6
  Top Layer w10: S2.2 932.68,-980.32 981,-932 981,-599 S1.2
  Bottom Layer w10: U2.3 957,-2755 987,-2725 987,-2071 846,-1930 846,-1388 932.68,-1301.32 S2.2
SEG5: S1.1 S2.1 U2.2 | length 2438.6
  Bottom Layer w10: S1.1 833,-780 877.68,-824.68 877.68,-1222 S2.1 748,-1351.68 748,-2768 785,-2805 U2.2
SEG6: S1.10 S2.10 U2.1 | length 3029.2
  Bottom Layer w10: U2.1 967,-2855 1024,-2798 1024,-2067 867,-1910 867,-1431 983,-1315 983,-1234 1032.68,-1184.32 S2.10 1079,-820.68 1079,-672 979,-572 979,-205 S1.10
SEG7: S1.5 S2.5 U2.32 | length 2692.3
  Top Layer w10: S2.5 1232.68,-1224.32 1282,-1175 1282,-805 1233,-756 S1.5
  Bottom Layer w10: S2.5 917,-1582.68 917,-1882 1078,-2043 1078,-2804 1129,-2855 U2.32
SEG8: S1.3 S2.3 | length 758.4
  Top Layer w10: S2.3 1032.68,-997.32 1084,-946 1084,-602 S1.3
SENSOR_SCK: Q7.2 U3.8 | length 347.2
  Bottom Layer w10: U3.8 1401.39,-3605.61 1438.74,-3568.26 Q7.2
SENSOR_SDA: Q8.2 U3.9 | length 367
  Bottom Layer w10: U3.9 1419.76,-3658.76 1447,-3686 1447,-3755.26 1466,-3774.26 Q8.2
STB: Q3.2 U3.32
SWIM: P1.2 U3.26
VCC_3.3V: C16.1 C17.1 C18.1 C23.1 C24.1 C25.1 C34.1 C55.1 C57.2 P1.1 P8.3 Q1.1 Q2.1 Q3.1 Q4.1 Q6.1 Q7.1 Q8.1 R22.2 R33.2 U3.6 U31.3 U.5 | length 875.1
  Top Layer w30: C23.1 C24.1 ; v3@1004,-5193 C24.1 ; U31.3@1044,-3239 1044,-3250 1073,-3279 C55.1 C57.2@1073,-3369.94 ; C25.1 C24.1
  Bottom Layer w20: P8.3 590,-3787 C34.1 ; U3.6 1123.24,-3542.76 1164,-3502 C17.1 ; C18.1 C16.1
  Bottom Layer w30: U.5 v3(1002,-5191) ; C17.1 C18.1
VCC_5V: C3.1 C4.1 C5.1 C6.1 C14.1 C15.1 C20.1 C21.1 C54.1 C56.2 D11.2 F1.1 P4.1 P6.1 R3.1 R8.1 R19.1 R23.1 R24.2 R26.1 R38.2 R47.2 R48.2 U1.10 U1.27 U2.17 U2.21 U31.2 | length 2569.5
  Top Layer w30: C56.2@885.06,-3223 C54.1 ; 985,-3223 1013.6,-3194.4 U31.2 1085.6,-3194.4 1101,-3179 1101,-3126
  Top Layer w40: U1.27 C3.1@1400,-2355 ; C3.1 1401,-2451 1441.48,-2491.48 D11.2 ; C3.1@1406,-2351 C14.1
  Top Layer w50: C15.1 U1.10 ; 1101,-3126 1101,-3070 1167,-3004 1256,-3004 1405,-2855 v2(1459,-2855) ; v2(1459,-2606) C20.1 ; D11.2@1655,-2495.52 C20.1 ; D11.2 1657.52,-2493 F1.1 ; 1741,-2500 C21.1 1740,-2606 C20.1
  Bottom Layer w50: U2.21 C4.1 1402.13,-2354.87 ; v2(1459,-2855) v2(1459,-2606)
pads on no net: U1.17 U1.18 U1.19 U1.20 U1.21 U1.22 U1.23 U1.24 U1.25 U1.26 U2.15 U2.18 U2.30 U2.31 U3.30

## Keep-outs
Keep-Out Layer:
  circle w5: c1968.5,-5905.51 r68.9
  circle w5: c196.85,-5905.51 r68.9
  circle w5: c1968.5,-492.13 r68.9
  circle w5: c196.85,-492.13 r68.9
  lines w5: 0,-6067 0,-38 ; 0,-6062.99 ccw(c39.37,-6062.99) 39.37,-6102.36 2125.64,-6102.36 ; 0,-39.37 cw(c39.37,-39.37) 39.37,0 ; 38,0 2125,0 ; 2125.98,-6102.36 ccw(c2125.98,-6062.99) 2165.35,-6062.99 ; 2125.98,0 cw(c2125.98,-39.37) 2165.35,-39.37 ; 2165.35,-6062.65 2165.35,-40.35

## Silkscreen, mask and mechanical layers (free items; w line width, h text height)
Mechanical 1:
  circle w5: c196.85,-492.13 r68.9
  circle w5: c1968.5,-492.13 r68.9
  circle w5: c196.85,-5905.51 r68.9
  circle w5: c1968.5,-5905.51 r68.9
  lines w5: 2125,0 39.37,0 ccw(c39.37,-39.37) 0,-39.37 0,-6062.99 ccw(c39.37,-6062.99) 39.37,-6102.36 2125.64,-6102.36 ; 2125.98,-6102.36 ccw(c2125.98,-6062.99) 2165.35,-6062.99 ; 2125.98,0 cw(c2125.98,-39.37) 2165.35,-39.37 ; 2165.35,-6062.65 2165.35,-40.35

## Text inside footprints (layer, text, board x,y; h text height)
D1: Top Overlay "+" at 495.92,-5038.68 h40
D2: Top Overlay "+" at 377.81,-5196.17 h40
D3: Top Overlay "+" at 338.44,-5353.65 h40
D4: Top Overlay "+" at 318.76,-5530.81 h40
D5: Top Overlay "+" at 377.81,-5707.98 h40
D6: Top Overlay "+" at 1669.43,-5000.68 h40 r180
D7: Top Overlay "+" at 1787.54,-5158.17 h40 r180
D8: Top Overlay "+" at 1826.91,-5316 h40 r180
D9: Top Overlay "+" at 1846.6,-5492.81 h40 r180
D10: Top Overlay "+" at 1787.54,-5669.98 h40 r180
K1: Top Overlay "+" at 428.18,-1958.13 h60
K2: Top Overlay "+" at 1491.17,-1958.13 h60
K3: Top Overlay "+" at 428.18,-3060.5 h60
K4: Top Overlay "+" at 1491.17,-3060.5 h60
K5: Top Overlay "+" at 428.18,-4162.86 h60
K6: Top Overlay "+" at 1491.17,-4162.86 h60
K7: Top Overlay "+" at 409,-4649 h60
L1: Top Overlay "+" at 172.28,-265.22 h60
L2: Top Overlay "+" at 1749.83,-265.22 h60
L3: Top Overlay "+" at 172.28,-954.2 h60
L4: Top Overlay "+" at 1749.83,-954.2 h60
L5: Top Overlay "+" at 230.57,-727.66 h40
L6: Top Overlay "+" at 1427.42,-727.66 h40
L7: Top Overlay "+" at 469.94,-727.66 h40
L8: Top Overlay "+" at 1666.79,-727.66 h40
L9: Top Overlay "+" at 1906.16,-727.03 h40
L10: Top Overlay "+" at 1188.05,-727.66 h40
L11: Top Overlay "+" at 948.68,-727.66 h40
L12: Top Overlay "+" at 709.31,-727.66 h40
L13: Top Overlay "+" at -8.8,-727.66 h40
LS1: Top Overlay "+" at 1799,-1201 h30 r270